# Altium PCB Main_Board.PcbDoc (part 3 of 14)
Units mm, origin at the board's own origin, x right, y up, seen from the top; angles counter-clockwise.
Board outline 142 x 82 mm, 10 copper layers (L1_Top, L2_PWR1, L3_Sig1, L4_GND1, L5_Sig2, L6_Sig3, L7_GND2, L8_Sig4, L9_GND3, L8_Bottom), stack 1.71 mm thick; 299 components, 328 nets, 2329 pads, 2908 vias.
Unrouted connection lines stored in the file: 2.
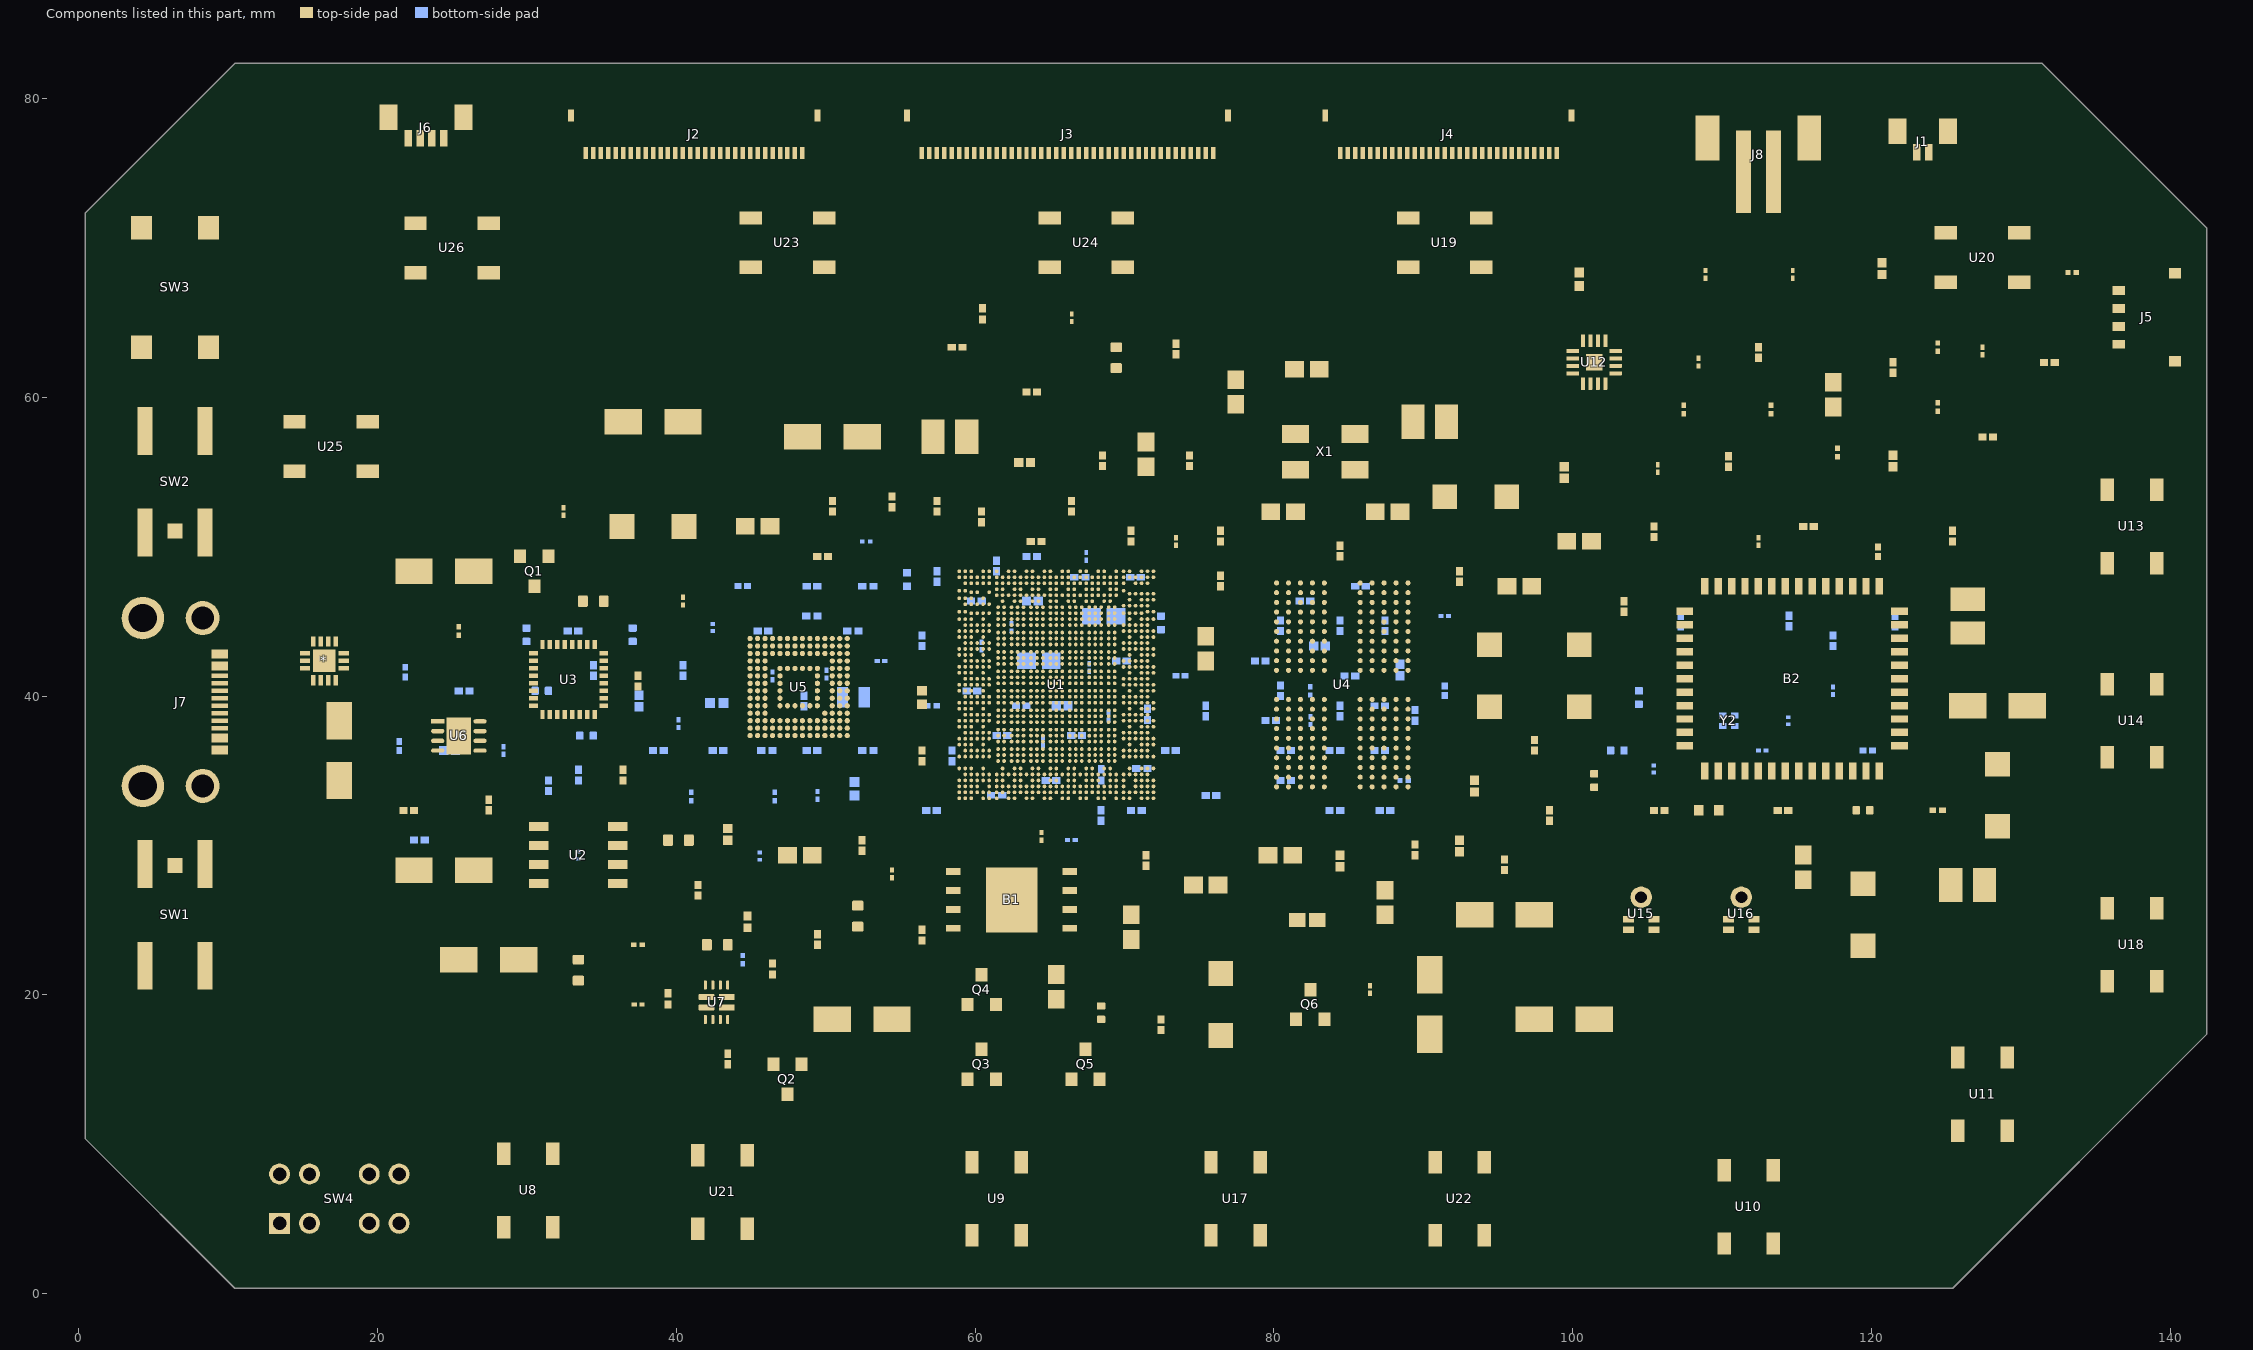
[diagram p11: the components of this part, seen from the top]

## Design rules (kind name [scope] priority, off if disabled: settings) (continued)
Clearance Clearance_1 [InNetClass('PULL_DOWN_UP_RESISTENCE') And (ExistsOnLayer('L3_Sig1') Or ExistsOnLayer('L5_Sig2') Or ExistsOnLayer('L6_Sig3') Or ExistsOnLayer('L8_Sig4')) vs InNetClass('MCU_SIGNAL') And (ExistsOnLayer('L3_Sig1') Or ExistsOnLayer('L5_Sig2') Or ExistsOnLayer('L6_Sig3') Or ExistsOnLayer('L8_Sig4'))] p254: gap=0.02 ignorepadtopadclearanceinfootprint=FALSE except(0.254: Hole-Hole) sourcerule=512 cellrowname=PULL_DOWN_UP_RESISTENCE cellrowtype=2 cellcolname=MCU_SIGNAL cellcoltype=2 innerlayers=TRUE
Clearance Clearance_2 [InNetClass('PULL_DOWN_UP_RESISTENCE') And (ExistsOnLayer('L1_Top') Or ExistsOnLayer('L8_Bottom')) vs InNetClass('MCU_SIGNAL') And (ExistsOnLayer('L1_Top') Or ExistsOnLayer('L8_Bottom'))] p255: gap=0.02 ignorepadtopadclearanceinfootprint=FALSE except(0.254: Hole-Hole) sourcerule=512 cellrowname=PULL_DOWN_UP_RESISTENCE cellrowtype=2 cellcolname=MCU_SIGNAL cellcoltype=2 outerlayers=TRUE
Clearance Clearance_3 [InNetClass('PULL_DOWN_UP_RESISTENCE') vs InNetClass('MCU_SIGNAL')] p256: gap=0.254 ignorepadtopadclearanceinfootprint=FALSE sourcerule=512 cellrowname=PULL_DOWN_UP_RESISTENCE cellrowtype=2 cellcolname=MCU_SIGNAL cellcoltype=2
Clearance Clearance_1 [InNetClass('PULL_DOWN_UP_RESISTENCE') And (ExistsOnLayer('L3_Sig1') Or ExistsOnLayer('L5_Sig2') Or ExistsOnLayer('L6_Sig3') Or ExistsOnLayer('L8_Sig4')) vs InNetClass('MIPI_HIGH_SPEED') And (ExistsOnLayer('L3_Sig1') Or ExistsOnLayer('L5_Sig2') Or ExistsOnLayer('L6_Sig3') Or ExistsOnLayer('L8_Sig4'))] p257: gap=0.02 ignorepadtopadclearanceinfootprint=FALSE except(0.254: Hole-Hole) sourcerule=512 cellrowname=PULL_DOWN_UP_RESISTENCE cellrowtype=2 cellcolname=MIPI_HIGH_SPEED cellcoltype=2 innerlayers=TRUE
Clearance Clearance_2 [InNetClass('PULL_DOWN_UP_RESISTENCE') And (ExistsOnLayer('L1_Top') Or ExistsOnLayer('L8_Bottom')) vs InNetClass('MIPI_HIGH_SPEED') And (ExistsOnLayer('L1_Top') Or ExistsOnLayer('L8_Bottom'))] p258: gap=0.02 ignorepadtopadclearanceinfootprint=FALSE except(0.254: Hole-Hole) sourcerule=512 cellrowname=PULL_DOWN_UP_RESISTENCE cellrowtype=2 cellcolname=MIPI_HIGH_SPEED cellcoltype=2 outerlayers=TRUE
Clearance Clearance_3 [InNetClass('PULL_DOWN_UP_RESISTENCE') vs InNetClass('MIPI_HIGH_SPEED')] p259: gap=0.254 ignorepadtopadclearanceinfootprint=FALSE sourcerule=512 cellrowname=PULL_DOWN_UP_RESISTENCE cellrowtype=2 cellcolname=MIPI_HIGH_SPEED cellcoltype=2
Clearance Clearance_1 [InNetClass('PULL_DOWN_UP_RESISTENCE') And (ExistsOnLayer('L3_Sig1') Or ExistsOnLayer('L5_Sig2') Or ExistsOnLayer('L6_Sig3') Or ExistsOnLayer('L8_Sig4')) vs InNetClass('PERIPHERICS_SIGNALS') And (ExistsOnLayer('L3_Sig1') Or ExistsOnLayer('L5_Sig2') Or ExistsOnLayer('L6_Sig3') Or ExistsOnLayer('L8_Sig4'))] p260: gap=0.02 ignorepadtopadclearanceinfootprint=FALSE except(0.254: Hole-Hole) sourcerule=512 cellrowname=PULL_DOWN_UP_RESISTENCE cellrowtype=2 cellcolname=PERIPHERICS_SIGNALS cellcoltype=2 innerlayers=TRUE
Clearance Clearance_2 [InNetClass('PULL_DOWN_UP_RESISTENCE') And (ExistsOnLayer('L1_Top') Or ExistsOnLayer('L8_Bottom')) vs InNetClass('PERIPHERICS_SIGNALS') And (ExistsOnLayer('L1_Top') Or ExistsOnLayer('L8_Bottom'))] p261: gap=0.02 ignorepadtopadclearanceinfootprint=FALSE except(0.254: Hole-Hole) sourcerule=512 cellrowname=PULL_DOWN_UP_RESISTENCE cellrowtype=2 cellcolname=PERIPHERICS_SIGNALS cellcoltype=2 outerlayers=TRUE
Clearance Clearance_3 [InNetClass('PULL_DOWN_UP_RESISTENCE') vs InNetClass('PERIPHERICS_SIGNALS')] p262: gap=0.254 ignorepadtopadclearanceinfootprint=FALSE sourcerule=512 cellrowname=PULL_DOWN_UP_RESISTENCE cellrowtype=2 cellcolname=PERIPHERICS_SIGNALS cellcoltype=2
Clearance Clearance_1 [InNetClass('PULL_DOWN_UP_RESISTENCE') And (ExistsOnLayer('L3_Sig1') Or ExistsOnLayer('L5_Sig2') Or ExistsOnLayer('L6_Sig3') Or ExistsOnLayer('L8_Sig4')) vs InNetClass('POWER_SIGNALS') And (ExistsOnLayer('L3_Sig1') Or ExistsOnLayer('L5_Sig2') Or ExistsOnLayer('L6_Sig3') Or ExistsOnLayer('L8_Sig4'))] p263: gap=0.02 ignorepadtopadclearanceinfootprint=FALSE except(0.254: Hole-Hole) sourcerule=512 cellrowname=PULL_DOWN_UP_RESISTENCE cellrowtype=2 cellcolname=POWER_SIGNALS cellcoltype=2 innerlayers=TRUE
Clearance Clearance_2 [InNetClass('PULL_DOWN_UP_RESISTENCE') And (ExistsOnLayer('L1_Top') Or ExistsOnLayer('L8_Bottom')) vs InNetClass('POWER_SIGNALS') And (ExistsOnLayer('L1_Top') Or ExistsOnLayer('L8_Bottom'))] p264: gap=0.02 ignorepadtopadclearanceinfootprint=FALSE except(0.254: Hole-Hole) sourcerule=512 cellrowname=PULL_DOWN_UP_RESISTENCE cellrowtype=2 cellcolname=POWER_SIGNALS cellcoltype=2 outerlayers=TRUE
Clearance Clearance_3 [InNetClass('PULL_DOWN_UP_RESISTENCE') vs InNetClass('POWER_SIGNALS')] p265: gap=0.254 ignorepadtopadclearanceinfootprint=FALSE sourcerule=512 cellrowname=PULL_DOWN_UP_RESISTENCE cellrowtype=2 cellcolname=POWER_SIGNALS cellcoltype=2
Clearance Clearance_1 [InNetClass('PULL_DOWN_UP_RESISTENCE') And (ExistsOnLayer('L3_Sig1') Or ExistsOnLayer('L5_Sig2') Or ExistsOnLayer('L6_Sig3') Or ExistsOnLayer('L8_Sig4')) vs InNetClass('POWER_SUPPLY') And (ExistsOnLayer('L3_Sig1') Or ExistsOnLayer('L5_Sig2') Or ExistsOnLayer('L6_Sig3') Or ExistsOnLayer('L8_Sig4'))] p266: gap=0.02 ignorepadtopadclearanceinfootprint=FALSE except(0.254: Hole-Hole) sourcerule=512 cellrowname=PULL_DOWN_UP_RESISTENCE cellrowtype=2 cellcolname=POWER_SUPPLY cellcoltype=2 innerlayers=TRUE
Clearance Clearance_2 [InNetClass('PULL_DOWN_UP_RESISTENCE') And (ExistsOnLayer('L1_Top') Or ExistsOnLayer('L8_Bottom')) vs InNetClass('POWER_SUPPLY') And (ExistsOnLayer('L1_Top') Or ExistsOnLayer('L8_Bottom'))] p267: gap=0.02 ignorepadtopadclearanceinfootprint=FALSE except(0.254: Hole-Hole) sourcerule=512 cellrowname=PULL_DOWN_UP_RESISTENCE cellrowtype=2 cellcolname=POWER_SUPPLY cellcoltype=2 outerlayers=TRUE
Clearance Clearance_3 [InNetClass('PULL_DOWN_UP_RESISTENCE') vs InNetClass('POWER_SUPPLY')] p268: gap=0.254 ignorepadtopadclearanceinfootprint=FALSE sourcerule=512 cellrowname=PULL_DOWN_UP_RESISTENCE cellrowtype=2 cellcolname=POWER_SUPPLY cellcoltype=2
Clearance Clearance_1 [InNetClass('PULL_DOWN_UP_RESISTENCE') And (ExistsOnLayer('L3_Sig1') Or ExistsOnLayer('L5_Sig2') Or ExistsOnLayer('L6_Sig3') Or ExistsOnLayer('L8_Sig4')) vs InNetClass('PULL_DOWN_UP_RESISTENCE') And (ExistsOnLayer('L3_Sig1') Or ExistsOnLayer('L5_Sig2') Or ExistsOnLayer('L6_Sig3') Or ExistsOnLayer('L8_Sig4'))] p269: gap=0.02 ignorepadtopadclearanceinfootprint=FALSE except(0.254: Hole-Hole) sourcerule=512 cellrowname=PULL_DOWN_UP_RESISTENCE cellrowtype=2 cellcolname=PULL_DOWN_UP_RESISTENCE cellcoltype=2 innerlayers=TRUE
Clearance Clearance_2 [InNetClass('PULL_DOWN_UP_RESISTENCE') And (ExistsOnLayer('L1_Top') Or ExistsOnLayer('L8_Bottom')) vs InNetClass('PULL_DOWN_UP_RESISTENCE') And (ExistsOnLayer('L1_Top') Or ExistsOnLayer('L8_Bottom'))] p270: gap=0.02 ignorepadtopadclearanceinfootprint=FALSE except(0.254: Hole-Hole) sourcerule=512 cellrowname=PULL_DOWN_UP_RESISTENCE cellrowtype=2 cellcolname=PULL_DOWN_UP_RESISTENCE cellcoltype=2 outerlayers=TRUE
Clearance Clearance_3 [InNetClass('PULL_DOWN_UP_RESISTENCE') vs InNetClass('PULL_DOWN_UP_RESISTENCE')] p271: gap=0.254 ignorepadtopadclearanceinfootprint=FALSE sourcerule=512 cellrowname=PULL_DOWN_UP_RESISTENCE cellrowtype=2 cellcolname=PULL_DOWN_UP_RESISTENCE cellcoltype=2
Clearance Clearance_1 [InNetClass('TYPEC_SIGNALS') And (ExistsOnLayer('L3_Sig1') Or ExistsOnLayer('L5_Sig2') Or ExistsOnLayer('L6_Sig3') Or ExistsOnLayer('L8_Sig4')) vs InNetClass('ANTENAS') And (ExistsOnLayer('L3_Sig1') Or ExistsOnLayer('L5_Sig2') Or ExistsOnLayer('L6_Sig3') Or ExistsOnLayer('L8_Sig4'))] p272: gap=0.02 ignorepadtopadclearanceinfootprint=FALSE except(0.05: Hole-Hole) sourcerule=512 cellrowname=TYPEC_SIGNALS cellrowtype=2 cellcolname=ANTENAS cellcoltype=2 innerlayers=TRUE
Clearance Clearance_2 [InNetClass('TYPEC_SIGNALS') And (ExistsOnLayer('L1_Top') Or ExistsOnLayer('L8_Bottom')) vs InNetClass('ANTENAS') And (ExistsOnLayer('L1_Top') Or ExistsOnLayer('L8_Bottom'))] p273: gap=0.02 ignorepadtopadclearanceinfootprint=FALSE except(0.05: Hole-Hole) sourcerule=512 cellrowname=TYPEC_SIGNALS cellrowtype=2 cellcolname=ANTENAS cellcoltype=2 outerlayers=TRUE
Clearance Clearance_3 [InNetClass('TYPEC_SIGNALS') vs InNetClass('ANTENAS')] p274: gap=0.254 ignorepadtopadclearanceinfootprint=FALSE sourcerule=512 cellrowname=TYPEC_SIGNALS cellrowtype=2 cellcolname=ANTENAS cellcoltype=2
Clearance Clearance_1 [InNetClass('TYPEC_SIGNALS') And (ExistsOnLayer('L3_Sig1') Or ExistsOnLayer('L5_Sig2') Or ExistsOnLayer('L6_Sig3') Or ExistsOnLayer('L8_Sig4')) vs (ExistsOnLayer('L3_Sig1') Or ExistsOnLayer('L5_Sig2') Or ExistsOnLayer('L6_Sig3') Or ExistsOnLayer('L8_Sig4'))] p275: gap=0.02 ignorepadtopadclearanceinfootprint=FALSE except(0.254: Hole-Hole) sourcerule=512 cellrowname=TYPEC_SIGNALS cellrowtype=2 cellcolname=All cellcoltype=0 innerlayers=TRUE
Clearance Clearance_2 [InNetClass('TYPEC_SIGNALS') And (ExistsOnLayer('L1_Top') Or ExistsOnLayer('L8_Bottom')) vs (ExistsOnLayer('L1_Top') Or ExistsOnLayer('L8_Bottom'))] p276: gap=0.02 ignorepadtopadclearanceinfootprint=FALSE except(0.254: Hole-Hole) sourcerule=512 cellrowname=TYPEC_SIGNALS cellrowtype=2 cellcolname=All cellcoltype=0 outerlayers=TRUE
Clearance Clearance_3 [InNetClass('TYPEC_SIGNALS')] p277: gap=0.254 ignorepadtopadclearanceinfootprint=FALSE sourcerule=512 cellrowname=TYPEC_SIGNALS cellrowtype=2 cellcolname=All cellcoltype=0
Clearance Clearance_1 [InNetClass('TYPEC_SIGNALS') And (ExistsOnLayer('L3_Sig1') Or ExistsOnLayer('L5_Sig2') Or ExistsOnLayer('L6_Sig3') Or ExistsOnLayer('L8_Sig4')) vs InNetClass('CPU_SIGNAL') And (ExistsOnLayer('L3_Sig1') Or ExistsOnLayer('L5_Sig2') Or ExistsOnLayer('L6_Sig3') Or ExistsOnLayer('L8_Sig4'))] p278: gap=0.02 ignorepadtopadclearanceinfootprint=FALSE except(0.254: Hole-Hole) sourcerule=512 cellrowname=TYPEC_SIGNALS cellrowtype=2 cellcolname=CPU_SIGNAL cellcoltype=2 innerlayers=TRUE
Clearance Clearance_2 [InNetClass('TYPEC_SIGNALS') And (ExistsOnLayer('L1_Top') Or ExistsOnLayer('L8_Bottom')) vs InNetClass('CPU_SIGNAL') And (ExistsOnLayer('L1_Top') Or ExistsOnLayer('L8_Bottom'))] p279: gap=0.02 ignorepadtopadclearanceinfootprint=FALSE except(0.254: Hole-Hole) sourcerule=512 cellrowname=TYPEC_SIGNALS cellrowtype=2 cellcolname=CPU_SIGNAL cellcoltype=2 outerlayers=TRUE
Clearance Clearance_3 [InNetClass('TYPEC_SIGNALS') vs InNetClass('CPU_SIGNAL')] p280: gap=0.254 ignorepadtopadclearanceinfootprint=FALSE sourcerule=512 cellrowname=TYPEC_SIGNALS cellrowtype=2 cellcolname=CPU_SIGNAL cellcoltype=2
Clearance Clearance_1 [InNetClass('TYPEC_SIGNALS') And (ExistsOnLayer('L3_Sig1') Or ExistsOnLayer('L5_Sig2') Or ExistsOnLayer('L6_Sig3') Or ExistsOnLayer('L8_Sig4')) vs InNetClass('CSI_HIGH_SPEED') And (ExistsOnLayer('L3_Sig1') Or ExistsOnLayer('L5_Sig2') Or ExistsOnLayer('L6_Sig3') Or ExistsOnLayer('L8_Sig4'))] p281: gap=0.02 ignorepadtopadclearanceinfootprint=FALSE except(0.254: Hole-Hole) sourcerule=512 cellrowname=TYPEC_SIGNALS cellrowtype=2 cellcolname=CSI_HIGH_SPEED cellcoltype=2 innerlayers=TRUE
Clearance Clearance_2 [InNetClass('TYPEC_SIGNALS') And (ExistsOnLayer('L1_Top') Or ExistsOnLayer('L8_Bottom')) vs InNetClass('CSI_HIGH_SPEED') And (ExistsOnLayer('L1_Top') Or ExistsOnLayer('L8_Bottom'))] p282: gap=0.02 ignorepadtopadclearanceinfootprint=FALSE except(0.254: Hole-Hole) sourcerule=512 cellrowname=TYPEC_SIGNALS cellrowtype=2 cellcolname=CSI_HIGH_SPEED cellcoltype=2 outerlayers=TRUE
Clearance Clearance_3 [InNetClass('TYPEC_SIGNALS') vs InNetClass('CSI_HIGH_SPEED')] p283: gap=0.254 ignorepadtopadclearanceinfootprint=FALSE sourcerule=512 cellrowname=TYPEC_SIGNALS cellrowtype=2 cellcolname=CSI_HIGH_SPEED cellcoltype=2
Clearance Clearance_1 [InNetClass('TYPEC_SIGNALS') And (ExistsOnLayer('L3_Sig1') Or ExistsOnLayer('L5_Sig2') Or ExistsOnLayer('L6_Sig3') Or ExistsOnLayer('L8_Sig4')) vs InNetClass('DDR1_HIGH_SPEED') And (ExistsOnLayer('L3_Sig1') Or ExistsOnLayer('L5_Sig2') Or ExistsOnLayer('L6_Sig3') Or ExistsOnLayer('L8_Sig4'))] p284: gap=0.02 ignorepadtopadclearanceinfootprint=FALSE except(0.089: Hole-Hole) sourcerule=512 cellrowname=TYPEC_SIGNALS cellrowtype=2 cellcolname=DDR1_HIGH_SPEED cellcoltype=2 innerlayers=TRUE
Clearance Clearance_2 [InNetClass('TYPEC_SIGNALS') And (ExistsOnLayer('L1_Top') Or ExistsOnLayer('L8_Bottom')) vs InNetClass('DDR1_HIGH_SPEED') And (ExistsOnLayer('L1_Top') Or ExistsOnLayer('L8_Bottom'))] p285: gap=0.02 ignorepadtopadclearanceinfootprint=FALSE except(0.089: Hole-Hole) sourcerule=512 cellrowname=TYPEC_SIGNALS cellrowtype=2 cellcolname=DDR1_HIGH_SPEED cellcoltype=2 outerlayers=TRUE
Clearance Clearance_3 [InNetClass('TYPEC_SIGNALS') vs InNetClass('DDR1_HIGH_SPEED')] p286: gap=0.254 ignorepadtopadclearanceinfootprint=FALSE sourcerule=512 cellrowname=TYPEC_SIGNALS cellrowtype=2 cellcolname=DDR1_HIGH_SPEED cellcoltype=2
Clearance Clearance_1 [InNetClass('TYPEC_SIGNALS') And (ExistsOnLayer('L3_Sig1') Or ExistsOnLayer('L5_Sig2') Or ExistsOnLayer('L6_Sig3') Or ExistsOnLayer('L8_Sig4')) vs InNetClass('EMMC_HIGH_SPEED') And (ExistsOnLayer('L3_Sig1') Or ExistsOnLayer('L5_Sig2') Or ExistsOnLayer('L6_Sig3') Or ExistsOnLayer('L8_Sig4'))] p287: gap=0.02 ignorepadtopadclearanceinfootprint=FALSE except(0.254: Hole-Hole) sourcerule=512 cellrowname=TYPEC_SIGNALS cellrowtype=2 cellcolname=EMMC_HIGH_SPEED cellcoltype=2 innerlayers=TRUE
Clearance Clearance_2 [InNetClass('TYPEC_SIGNALS') And (ExistsOnLayer('L1_Top') Or ExistsOnLayer('L8_Bottom')) vs InNetClass('EMMC_HIGH_SPEED') And (ExistsOnLayer('L1_Top') Or ExistsOnLayer('L8_Bottom'))] p288: gap=0.02 ignorepadtopadclearanceinfootprint=FALSE except(0.254: Hole-Hole) sourcerule=512 cellrowname=TYPEC_SIGNALS cellrowtype=2 cellcolname=EMMC_HIGH_SPEED cellcoltype=2 outerlayers=TRUE
Clearance Clearance_3 [InNetClass('TYPEC_SIGNALS') vs InNetClass('EMMC_HIGH_SPEED')] p289: gap=0.254 ignorepadtopadclearanceinfootprint=FALSE sourcerule=512 cellrowname=TYPEC_SIGNALS cellrowtype=2 cellcolname=EMMC_HIGH_SPEED cellcoltype=2
Clearance Clearance_1 [InNetClass('TYPEC_SIGNALS') And (ExistsOnLayer('L3_Sig1') Or ExistsOnLayer('L5_Sig2') Or ExistsOnLayer('L6_Sig3') Or ExistsOnLayer('L8_Sig4')) vs InNetClass('I2S_PROTOCOL') And (ExistsOnLayer('L3_Sig1') Or ExistsOnLayer('L5_Sig2') Or ExistsOnLayer('L6_Sig3') Or ExistsOnLayer('L8_Sig4'))] p290: gap=0.02 ignorepadtopadclearanceinfootprint=FALSE except(0.254: Hole-Hole) sourcerule=512 cellrowname=TYPEC_SIGNALS cellrowtype=2 cellcolname=I2S_PROTOCOL cellcoltype=2 innerlayers=TRUE
Clearance Clearance_2 [InNetClass('TYPEC_SIGNALS') And (ExistsOnLayer('L1_Top') Or ExistsOnLayer('L8_Bottom')) vs InNetClass('I2S_PROTOCOL') And (ExistsOnLayer('L1_Top') Or ExistsOnLayer('L8_Bottom'))] p291: gap=0.02 ignorepadtopadclearanceinfootprint=FALSE except(0.254: Hole-Hole) sourcerule=512 cellrowname=TYPEC_SIGNALS cellrowtype=2 cellcolname=I2S_PROTOCOL cellcoltype=2 outerlayers=TRUE
Clearance Clearance_3 [InNetClass('TYPEC_SIGNALS') vs InNetClass('I2S_PROTOCOL')] p292: gap=0.254 ignorepadtopadclearanceinfootprint=FALSE sourcerule=512 cellrowname=TYPEC_SIGNALS cellrowtype=2 cellcolname=I2S_PROTOCOL cellcoltype=2
Clearance Clearance_1 [InNetClass('TYPEC_SIGNALS') And (ExistsOnLayer('L3_Sig1') Or ExistsOnLayer('L5_Sig2') Or ExistsOnLayer('L6_Sig3') Or ExistsOnLayer('L8_Sig4')) vs InNetClass('MCU_SIGNAL') And (ExistsOnLayer('L3_Sig1') Or ExistsOnLayer('L5_Sig2') Or ExistsOnLayer('L6_Sig3') Or ExistsOnLayer('L8_Sig4'))] p293: gap=0.02 ignorepadtopadclearanceinfootprint=FALSE except(0.254: Hole-Hole) sourcerule=512 cellrowname=TYPEC_SIGNALS cellrowtype=2 cellcolname=MCU_SIGNAL cellcoltype=2 innerlayers=TRUE
Clearance Clearance_2 [InNetClass('TYPEC_SIGNALS') And (ExistsOnLayer('L1_Top') Or ExistsOnLayer('L8_Bottom')) vs InNetClass('MCU_SIGNAL') And (ExistsOnLayer('L1_Top') Or ExistsOnLayer('L8_Bottom'))] p294: gap=0.02 ignorepadtopadclearanceinfootprint=FALSE except(0.254: Hole-Hole) sourcerule=512 cellrowname=TYPEC_SIGNALS cellrowtype=2 cellcolname=MCU_SIGNAL cellcoltype=2 outerlayers=TRUE
Clearance Clearance_3 [InNetClass('TYPEC_SIGNALS') vs InNetClass('MCU_SIGNAL')] p295: gap=0.254 ignorepadtopadclearanceinfootprint=FALSE sourcerule=512 cellrowname=TYPEC_SIGNALS cellrowtype=2 cellcolname=MCU_SIGNAL cellcoltype=2
Clearance Clearance_1 [InNetClass('TYPEC_SIGNALS') And (ExistsOnLayer('L3_Sig1') Or ExistsOnLayer('L5_Sig2') Or ExistsOnLayer('L6_Sig3') Or ExistsOnLayer('L8_Sig4')) vs InNetClass('MIPI_HIGH_SPEED') And (ExistsOnLayer('L3_Sig1') Or ExistsOnLayer('L5_Sig2') Or ExistsOnLayer('L6_Sig3') Or ExistsOnLayer('L8_Sig4'))] p296: gap=0.02 ignorepadtopadclearanceinfootprint=FALSE except(0.254: Hole-Hole) sourcerule=512 cellrowname=TYPEC_SIGNALS cellrowtype=2 cellcolname=MIPI_HIGH_SPEED cellcoltype=2 innerlayers=TRUE
Clearance Clearance_2 [InNetClass('TYPEC_SIGNALS') And (ExistsOnLayer('L1_Top') Or ExistsOnLayer('L8_Bottom')) vs InNetClass('MIPI_HIGH_SPEED') And (ExistsOnLayer('L1_Top') Or ExistsOnLayer('L8_Bottom'))] p297: gap=0.02 ignorepadtopadclearanceinfootprint=FALSE except(0.254: Hole-Hole) sourcerule=512 cellrowname=TYPEC_SIGNALS cellrowtype=2 cellcolname=MIPI_HIGH_SPEED cellcoltype=2 outerlayers=TRUE
Clearance Clearance_3 [InNetClass('TYPEC_SIGNALS') vs InNetClass('MIPI_HIGH_SPEED')] p298: gap=0.254 ignorepadtopadclearanceinfootprint=FALSE sourcerule=512 cellrowname=TYPEC_SIGNALS cellrowtype=2 cellcolname=MIPI_HIGH_SPEED cellcoltype=2
Clearance Clearance_1 [InNetClass('TYPEC_SIGNALS') And (ExistsOnLayer('L3_Sig1') Or ExistsOnLayer('L5_Sig2') Or ExistsOnLayer('L6_Sig3') Or ExistsOnLayer('L8_Sig4')) vs InNetClass('PERIPHERICS_SIGNALS') And (ExistsOnLayer('L3_Sig1') Or ExistsOnLayer('L5_Sig2') Or ExistsOnLayer('L6_Sig3') Or ExistsOnLayer('L8_Sig4'))] p299: gap=0.02 ignorepadtopadclearanceinfootprint=FALSE except(0.254: Hole-Hole) sourcerule=512 cellrowname=TYPEC_SIGNALS cellrowtype=2 cellcolname=PERIPHERICS_SIGNALS cellcoltype=2 innerlayers=TRUE
Clearance Clearance_2 [InNetClass('TYPEC_SIGNALS') And (ExistsOnLayer('L1_Top') Or ExistsOnLayer('L8_Bottom')) vs InNetClass('PERIPHERICS_SIGNALS') And (ExistsOnLayer('L1_Top') Or ExistsOnLayer('L8_Bottom'))] p300: gap=0.02 ignorepadtopadclearanceinfootprint=FALSE except(0.254: Hole-Hole) sourcerule=512 cellrowname=TYPEC_SIGNALS cellrowtype=2 cellcolname=PERIPHERICS_SIGNALS cellcoltype=2 outerlayers=TRUE
Clearance Clearance_3 [InNetClass('TYPEC_SIGNALS') vs InNetClass('PERIPHERICS_SIGNALS')] p301: gap=0.254 ignorepadtopadclearanceinfootprint=FALSE sourcerule=512 cellrowname=TYPEC_SIGNALS cellrowtype=2 cellcolname=PERIPHERICS_SIGNALS cellcoltype=2
Clearance Clearance_1 [InNetClass('TYPEC_SIGNALS') And (ExistsOnLayer('L3_Sig1') Or ExistsOnLayer('L5_Sig2') Or ExistsOnLayer('L6_Sig3') Or ExistsOnLayer('L8_Sig4')) vs InNetClass('POWER_SIGNALS') And (ExistsOnLayer('L3_Sig1') Or ExistsOnLayer('L5_Sig2') Or ExistsOnLayer('L6_Sig3') Or ExistsOnLayer('L8_Sig4'))] p302: gap=0.02 ignorepadtopadclearanceinfootprint=FALSE except(0.254: Hole-Hole) sourcerule=512 cellrowname=TYPEC_SIGNALS cellrowtype=2 cellcolname=POWER_SIGNALS cellcoltype=2 innerlayers=TRUE
Clearance Clearance_2 [InNetClass('TYPEC_SIGNALS') And (ExistsOnLayer('L1_Top') Or ExistsOnLayer('L8_Bottom')) vs InNetClass('POWER_SIGNALS') And (ExistsOnLayer('L1_Top') Or ExistsOnLayer('L8_Bottom'))] p303: gap=0.02 ignorepadtopadclearanceinfootprint=FALSE except(0.254: Hole-Hole) sourcerule=512 cellrowname=TYPEC_SIGNALS cellrowtype=2 cellcolname=POWER_SIGNALS cellcoltype=2 outerlayers=TRUE
Clearance Clearance_3 [InNetClass('TYPEC_SIGNALS') vs InNetClass('POWER_SIGNALS')] p304: gap=0.254 ignorepadtopadclearanceinfootprint=FALSE sourcerule=512 cellrowname=TYPEC_SIGNALS cellrowtype=2 cellcolname=POWER_SIGNALS cellcoltype=2
Clearance Clearance_1 [InNetClass('TYPEC_SIGNALS') And (ExistsOnLayer('L3_Sig1') Or ExistsOnLayer('L5_Sig2') Or ExistsOnLayer('L6_Sig3') Or ExistsOnLayer('L8_Sig4')) vs InNetClass('POWER_SUPPLY') And (ExistsOnLayer('L3_Sig1') Or ExistsOnLayer('L5_Sig2') Or ExistsOnLayer('L6_Sig3') Or ExistsOnLayer('L8_Sig4'))] p305: gap=0.02 ignorepadtopadclearanceinfootprint=FALSE except(0.254: Hole-Hole) sourcerule=512 cellrowname=TYPEC_SIGNALS cellrowtype=2 cellcolname=POWER_SUPPLY cellcoltype=2 innerlayers=TRUE
Clearance Clearance_2 [InNetClass('TYPEC_SIGNALS') And (ExistsOnLayer('L1_Top') Or ExistsOnLayer('L8_Bottom')) vs InNetClass('POWER_SUPPLY') And (ExistsOnLayer('L1_Top') Or ExistsOnLayer('L8_Bottom'))] p306: gap=0.02 ignorepadtopadclearanceinfootprint=FALSE except(0.254: Hole-Hole) sourcerule=512 cellrowname=TYPEC_SIGNALS cellrowtype=2 cellcolname=POWER_SUPPLY cellcoltype=2 outerlayers=TRUE
Clearance Clearance_3 [InNetClass('TYPEC_SIGNALS') vs InNetClass('POWER_SUPPLY')] p307: gap=0.254 ignorepadtopadclearanceinfootprint=FALSE sourcerule=512 cellrowname=TYPEC_SIGNALS cellrowtype=2 cellcolname=POWER_SUPPLY cellcoltype=2
Clearance Clearance_1 [InNetClass('TYPEC_SIGNALS') And (ExistsOnLayer('L3_Sig1') Or ExistsOnLayer('L5_Sig2') Or ExistsOnLayer('L6_Sig3') Or ExistsOnLayer('L8_Sig4')) vs InNetClass('PULL_DOWN_UP_RESISTENCE') And (ExistsOnLayer('L3_Sig1') Or ExistsOnLayer('L5_Sig2') Or ExistsOnLayer('L6_Sig3') Or ExistsOnLayer('L8_Sig4'))] p308: gap=0.02 ignorepadtopadclearanceinfootprint=FALSE except(0.254: Hole-Hole) sourcerule=512 cellrowname=TYPEC_SIGNALS cellrowtype=2 cellcolname=PULL_DOWN_UP_RESISTENCE cellcoltype=2 innerlayers=TRUE
Clearance Clearance_2 [InNetClass('TYPEC_SIGNALS') And (ExistsOnLayer('L1_Top') Or ExistsOnLayer('L8_Bottom')) vs InNetClass('PULL_DOWN_UP_RESISTENCE') And (ExistsOnLayer('L1_Top') Or ExistsOnLayer('L8_Bottom'))] p309: gap=0.02 ignorepadtopadclearanceinfootprint=FALSE except(0.254: Hole-Hole) sourcerule=512 cellrowname=TYPEC_SIGNALS cellrowtype=2 cellcolname=PULL_DOWN_UP_RESISTENCE cellcoltype=2 outerlayers=TRUE
Clearance Clearance_3 [InNetClass('TYPEC_SIGNALS') vs InNetClass('PULL_DOWN_UP_RESISTENCE')] p310: gap=0.254 ignorepadtopadclearanceinfootprint=FALSE sourcerule=512 cellrowname=TYPEC_SIGNALS cellrowtype=2 cellcolname=PULL_DOWN_UP_RESISTENCE cellcoltype=2
Clearance Clearance_1 [InNetClass('TYPEC_SIGNALS') And (ExistsOnLayer('L3_Sig1') Or ExistsOnLayer('L5_Sig2') Or ExistsOnLayer('L6_Sig3') Or ExistsOnLayer('L8_Sig4')) vs InNetClass('TYPEC_SIGNALS') And (ExistsOnLayer('L3_Sig1') Or ExistsOnLayer('L5_Sig2') Or ExistsOnLayer('L6_Sig3') Or ExistsOnLayer('L8_Sig4'))] p311: gap=0.02 ignorepadtopadclearanceinfootprint=FALSE except(0.254: Hole-Hole) sourcerule=512 cellrowname=TYPEC_SIGNALS cellrowtype=2 cellcolname=TYPEC_SIGNALS cellcoltype=2 innerlayers=TRUE
Clearance Clearance_2 [InNetClass('TYPEC_SIGNALS') And (ExistsOnLayer('L1_Top') Or ExistsOnLayer('L8_Bottom')) vs InNetClass('TYPEC_SIGNALS') And (ExistsOnLayer('L1_Top') Or ExistsOnLayer('L8_Bottom'))] p312: gap=0.02 ignorepadtopadclearanceinfootprint=FALSE except(0.254: Hole-Hole) sourcerule=512 cellrowname=TYPEC_SIGNALS cellrowtype=2 cellcolname=TYPEC_SIGNALS cellcoltype=2 outerlayers=TRUE
Clearance Clearance_3 [InNetClass('TYPEC_SIGNALS') vs InNetClass('TYPEC_SIGNALS')] p313: gap=0.254 ignorepadtopadclearanceinfootprint=FALSE sourcerule=512 cellrowname=TYPEC_SIGNALS cellrowtype=2 cellcolname=TYPEC_SIGNALS cellcoltype=2
Clearance Clearance_1 [InNetClass('UNCLASIFICATE_LOW_SPEED_SIGNALS') And (ExistsOnLayer('L3_Sig1') Or ExistsOnLayer('L5_Sig2') Or ExistsOnLayer('L6_Sig3') Or ExistsOnLayer('L8_Sig4')) vs InNetClass('ANTENAS') And (ExistsOnLayer('L3_Sig1') Or ExistsOnLayer('L5_Sig2') Or ExistsOnLayer('L6_Sig3') Or ExistsOnLayer('L8_Sig4'))] p314: gap=0.02 ignorepadtopadclearanceinfootprint=FALSE except(0.05: Hole-Hole) sourcerule=512 cellrowname=UNCLASIFICATE_LOW_SPEED_SIGNALS cellrowtype=2 cellcolname=ANTENAS cellcoltype=2 innerlayers=TRUE
Clearance Clearance_2 [InNetClass('UNCLASIFICATE_LOW_SPEED_SIGNALS') And (ExistsOnLayer('L1_Top') Or ExistsOnLayer('L8_Bottom')) vs InNetClass('ANTENAS') And (ExistsOnLayer('L1_Top') Or ExistsOnLayer('L8_Bottom'))] p315: gap=0.02 ignorepadtopadclearanceinfootprint=FALSE except(0.05: Hole-Hole) sourcerule=512 cellrowname=UNCLASIFICATE_LOW_SPEED_SIGNALS cellrowtype=2 cellcolname=ANTENAS cellcoltype=2 outerlayers=TRUE
Clearance Clearance_3 [InNetClass('UNCLASIFICATE_LOW_SPEED_SIGNALS') vs InNetClass('ANTENAS')] p316: gap=0.254 ignorepadtopadclearanceinfootprint=FALSE sourcerule=512 cellrowname=UNCLASIFICATE_LOW_SPEED_SIGNALS cellrowtype=2 cellcolname=ANTENAS cellcoltype=2
Clearance Clearance_1 [InNetClass('UNCLASIFICATE_LOW_SPEED_SIGNALS') And (ExistsOnLayer('L3_Sig1') Or ExistsOnLayer('L5_Sig2') Or ExistsOnLayer('L6_Sig3') Or ExistsOnLayer('L8_Sig4')) vs (ExistsOnLayer('L3_Sig1') Or ExistsOnLayer('L5_Sig2') Or ExistsOnLayer('L6_Sig3') Or ExistsOnLayer('L8_Sig4'))] p317: gap=0.02 ignorepadtopadclearanceinfootprint=FALSE except(0.254: Hole-Hole) sourcerule=512 cellrowname=UNCLASIFICATE_LOW_SPEED_SIGNALS cellrowtype=2 cellcolname=All cellcoltype=0 innerlayers=TRUE
Clearance Clearance_2 [InNetClass('UNCLASIFICATE_LOW_SPEED_SIGNALS') And (ExistsOnLayer('L1_Top') Or ExistsOnLayer('L8_Bottom')) vs (ExistsOnLayer('L1_Top') Or ExistsOnLayer('L8_Bottom'))] p318: gap=0.02 ignorepadtopadclearanceinfootprint=FALSE except(0.254: Hole-Hole) sourcerule=512 cellrowname=UNCLASIFICATE_LOW_SPEED_SIGNALS cellrowtype=2 cellcolname=All cellcoltype=0 outerlayers=TRUE
Clearance Clearance_3 [InNetClass('UNCLASIFICATE_LOW_SPEED_SIGNALS')] p319: gap=0.254 ignorepadtopadclearanceinfootprint=FALSE sourcerule=512 cellrowname=UNCLASIFICATE_LOW_SPEED_SIGNALS cellrowtype=2 cellcolname=All cellcoltype=0
Clearance Clearance_1 [InNetClass('UNCLASIFICATE_LOW_SPEED_SIGNALS') And (ExistsOnLayer('L3_Sig1') Or ExistsOnLayer('L5_Sig2') Or ExistsOnLayer('L6_Sig3') Or ExistsOnLayer('L8_Sig4')) vs InNetClass('CPU_SIGNAL') And (ExistsOnLayer('L3_Sig1') Or ExistsOnLayer('L5_Sig2') Or ExistsOnLayer('L6_Sig3') Or ExistsOnLayer('L8_Sig4'))] p320: gap=0.02 ignorepadtopadclearanceinfootprint=FALSE except(0.254: Hole-Hole) sourcerule=512 cellrowname=UNCLASIFICATE_LOW_SPEED_SIGNALS cellrowtype=2 cellcolname=CPU_SIGNAL cellcoltype=2 innerlayers=TRUE
Clearance Clearance_2 [InNetClass('UNCLASIFICATE_LOW_SPEED_SIGNALS') And (ExistsOnLayer('L1_Top') Or ExistsOnLayer('L8_Bottom')) vs InNetClass('CPU_SIGNAL') And (ExistsOnLayer('L1_Top') Or ExistsOnLayer('L8_Bottom'))] p321: gap=0.02 ignorepadtopadclearanceinfootprint=FALSE except(0.254: Hole-Hole) sourcerule=512 cellrowname=UNCLASIFICATE_LOW_SPEED_SIGNALS cellrowtype=2 cellcolname=CPU_SIGNAL cellcoltype=2 outerlayers=TRUE
Clearance Clearance_3 [InNetClass('UNCLASIFICATE_LOW_SPEED_SIGNALS') vs InNetClass('CPU_SIGNAL')] p322: gap=0.254 ignorepadtopadclearanceinfootprint=FALSE sourcerule=512 cellrowname=UNCLASIFICATE_LOW_SPEED_SIGNALS cellrowtype=2 cellcolname=CPU_SIGNAL cellcoltype=2
Clearance Clearance_1 [InNetClass('UNCLASIFICATE_LOW_SPEED_SIGNALS') And (ExistsOnLayer('L3_Sig1') Or ExistsOnLayer('L5_Sig2') Or ExistsOnLayer('L6_Sig3') Or ExistsOnLayer('L8_Sig4')) vs InNetClass('CSI_HIGH_SPEED') And (ExistsOnLayer('L3_Sig1') Or ExistsOnLayer('L5_Sig2') Or ExistsOnLayer('L6_Sig3') Or ExistsOnLayer('L8_Sig4'))] p323: gap=0.02 ignorepadtopadclearanceinfootprint=FALSE except(0.254: Hole-Hole) sourcerule=512 cellrowname=UNCLASIFICATE_LOW_SPEED_SIGNALS cellrowtype=2 cellcolname=CSI_HIGH_SPEED cellcoltype=2 innerlayers=TRUE
Clearance Clearance_2 [InNetClass('UNCLASIFICATE_LOW_SPEED_SIGNALS') And (ExistsOnLayer('L1_Top') Or ExistsOnLayer('L8_Bottom')) vs InNetClass('CSI_HIGH_SPEED') And (ExistsOnLayer('L1_Top') Or ExistsOnLayer('L8_Bottom'))] p324: gap=0.02 ignorepadtopadclearanceinfootprint=FALSE except(0.254: Hole-Hole) sourcerule=512 cellrowname=UNCLASIFICATE_LOW_SPEED_SIGNALS cellrowtype=2 cellcolname=CSI_HIGH_SPEED cellcoltype=2 outerlayers=TRUE
Clearance Clearance_3 [InNetClass('UNCLASIFICATE_LOW_SPEED_SIGNALS') vs InNetClass('CSI_HIGH_SPEED')] p325: gap=0.254 ignorepadtopadclearanceinfootprint=FALSE sourcerule=512 cellrowname=UNCLASIFICATE_LOW_SPEED_SIGNALS cellrowtype=2 cellcolname=CSI_HIGH_SPEED cellcoltype=2
Clearance Clearance_1 [InNetClass('UNCLASIFICATE_LOW_SPEED_SIGNALS') And (ExistsOnLayer('L3_Sig1') Or ExistsOnLayer('L5_Sig2') Or ExistsOnLayer('L6_Sig3') Or ExistsOnLayer('L8_Sig4')) vs InNetClass('DDR1_HIGH_SPEED') And (ExistsOnLayer('L3_Sig1') Or ExistsOnLayer('L5_Sig2') Or ExistsOnLayer('L6_Sig3') Or ExistsOnLayer('L8_Sig4'))] p326: gap=0.02 ignorepadtopadclearanceinfootprint=FALSE except(0.089: Hole-Hole) sourcerule=512 cellrowname=UNCLASIFICATE_LOW_SPEED_SIGNALS cellrowtype=2 cellcolname=DDR1_HIGH_SPEED cellcoltype=2 innerlayers=TRUE
Clearance Clearance_2 [InNetClass('UNCLASIFICATE_LOW_SPEED_SIGNALS') And (ExistsOnLayer('L1_Top') Or ExistsOnLayer('L8_Bottom')) vs InNetClass('DDR1_HIGH_SPEED') And (ExistsOnLayer('L1_Top') Or ExistsOnLayer('L8_Bottom'))] p327: gap=0.02 ignorepadtopadclearanceinfootprint=FALSE except(0.089: Hole-Hole) sourcerule=512 cellrowname=UNCLASIFICATE_LOW_SPEED_SIGNALS cellrowtype=2 cellcolname=DDR1_HIGH_SPEED cellcoltype=2 outerlayers=TRUE
Clearance Clearance_3 [InNetClass('UNCLASIFICATE_LOW_SPEED_SIGNALS') vs InNetClass('DDR1_HIGH_SPEED')] p328: gap=0.254 ignorepadtopadclearanceinfootprint=FALSE sourcerule=512 cellrowname=UNCLASIFICATE_LOW_SPEED_SIGNALS cellrowtype=2 cellcolname=DDR1_HIGH_SPEED cellcoltype=2
Clearance Clearance_1 [InNetClass('UNCLASIFICATE_LOW_SPEED_SIGNALS') And (ExistsOnLayer('L3_Sig1') Or ExistsOnLayer('L5_Sig2') Or ExistsOnLayer('L6_Sig3') Or ExistsOnLayer('L8_Sig4')) vs InNetClass('EMMC_HIGH_SPEED') And (ExistsOnLayer('L3_Sig1') Or ExistsOnLayer('L5_Sig2') Or ExistsOnLayer('L6_Sig3') Or ExistsOnLayer('L8_Sig4'))] p329: gap=0.02 ignorepadtopadclearanceinfootprint=FALSE except(0.254: Hole-Hole) sourcerule=512 cellrowname=UNCLASIFICATE_LOW_SPEED_SIGNALS cellrowtype=2 cellcolname=EMMC_HIGH_SPEED cellcoltype=2 innerlayers=TRUE
Clearance Clearance_2 [InNetClass('UNCLASIFICATE_LOW_SPEED_SIGNALS') And (ExistsOnLayer('L1_Top') Or ExistsOnLayer('L8_Bottom')) vs InNetClass('EMMC_HIGH_SPEED') And (ExistsOnLayer('L1_Top') Or ExistsOnLayer('L8_Bottom'))] p330: gap=0.02 ignorepadtopadclearanceinfootprint=FALSE except(0.254: Hole-Hole) sourcerule=512 cellrowname=UNCLASIFICATE_LOW_SPEED_SIGNALS cellrowtype=2 cellcolname=EMMC_HIGH_SPEED cellcoltype=2 outerlayers=TRUE
Clearance Clearance_3 [InNetClass('UNCLASIFICATE_LOW_SPEED_SIGNALS') vs InNetClass('EMMC_HIGH_SPEED')] p331: gap=0.254 ignorepadtopadclearanceinfootprint=FALSE sourcerule=512 cellrowname=UNCLASIFICATE_LOW_SPEED_SIGNALS cellrowtype=2 cellcolname=EMMC_HIGH_SPEED cellcoltype=2
Clearance Clearance_1 [InNetClass('UNCLASIFICATE_LOW_SPEED_SIGNALS') And (ExistsOnLayer('L3_Sig1') Or ExistsOnLayer('L5_Sig2') Or ExistsOnLayer('L6_Sig3') Or ExistsOnLayer('L8_Sig4')) vs InNetClass('I2S_PROTOCOL') And (ExistsOnLayer('L3_Sig1') Or ExistsOnLayer('L5_Sig2') Or ExistsOnLayer('L6_Sig3') Or ExistsOnLayer('L8_Sig4'))] p332: gap=0.02 ignorepadtopadclearanceinfootprint=FALSE except(0.254: Hole-Hole) sourcerule=512 cellrowname=UNCLASIFICATE_LOW_SPEED_SIGNALS cellrowtype=2 cellcolname=I2S_PROTOCOL cellcoltype=2 innerlayers=TRUE
Clearance Clearance_2 [InNetClass('UNCLASIFICATE_LOW_SPEED_SIGNALS') And (ExistsOnLayer('L1_Top') Or ExistsOnLayer('L8_Bottom')) vs InNetClass('I2S_PROTOCOL') And (ExistsOnLayer('L1_Top') Or ExistsOnLayer('L8_Bottom'))] p333: gap=0.02 ignorepadtopadclearanceinfootprint=FALSE except(0.254: Hole-Hole) sourcerule=512 cellrowname=UNCLASIFICATE_LOW_SPEED_SIGNALS cellrowtype=2 cellcolname=I2S_PROTOCOL cellcoltype=2 outerlayers=TRUE
Clearance Clearance_3 [InNetClass('UNCLASIFICATE_LOW_SPEED_SIGNALS') vs InNetClass('I2S_PROTOCOL')] p334: gap=0.254 ignorepadtopadclearanceinfootprint=FALSE sourcerule=512 cellrowname=UNCLASIFICATE_LOW_SPEED_SIGNALS cellrowtype=2 cellcolname=I2S_PROTOCOL cellcoltype=2
Clearance Clearance_1 [InNetClass('UNCLASIFICATE_LOW_SPEED_SIGNALS') And (ExistsOnLayer('L3_Sig1') Or ExistsOnLayer('L5_Sig2') Or ExistsOnLayer('L6_Sig3') Or ExistsOnLayer('L8_Sig4')) vs InNetClass('MCU_SIGNAL') And (ExistsOnLayer('L3_Sig1') Or ExistsOnLayer('L5_Sig2') Or ExistsOnLayer('L6_Sig3') Or ExistsOnLayer('L8_Sig4'))] p335: gap=0.02 ignorepadtopadclearanceinfootprint=FALSE except(0.254: Hole-Hole) sourcerule=512 cellrowname=UNCLASIFICATE_LOW_SPEED_SIGNALS cellrowtype=2 cellcolname=MCU_SIGNAL cellcoltype=2 innerlayers=TRUE
Clearance Clearance_2 [InNetClass('UNCLASIFICATE_LOW_SPEED_SIGNALS') And (ExistsOnLayer('L1_Top') Or ExistsOnLayer('L8_Bottom')) vs InNetClass('MCU_SIGNAL') And (ExistsOnLayer('L1_Top') Or ExistsOnLayer('L8_Bottom'))] p336: gap=0.02 ignorepadtopadclearanceinfootprint=FALSE except(0.254: Hole-Hole) sourcerule=512 cellrowname=UNCLASIFICATE_LOW_SPEED_SIGNALS cellrowtype=2 cellcolname=MCU_SIGNAL cellcoltype=2 outerlayers=TRUE
Clearance Clearance_3 [InNetClass('UNCLASIFICATE_LOW_SPEED_SIGNALS') vs InNetClass('MCU_SIGNAL')] p337: gap=0.254 ignorepadtopadclearanceinfootprint=FALSE sourcerule=512 cellrowname=UNCLASIFICATE_LOW_SPEED_SIGNALS cellrowtype=2 cellcolname=MCU_SIGNAL cellcoltype=2
Clearance Clearance_1 [InNetClass('UNCLASIFICATE_LOW_SPEED_SIGNALS') And (ExistsOnLayer('L3_Sig1') Or ExistsOnLayer('L5_Sig2') Or ExistsOnLayer('L6_Sig3') Or ExistsOnLayer('L8_Sig4')) vs InNetClass('MIPI_HIGH_SPEED') And (ExistsOnLayer('L3_Sig1') Or ExistsOnLayer('L5_Sig2') Or ExistsOnLayer('L6_Sig3') Or ExistsOnLayer('L8_Sig4'))] p338: gap=0.02 ignorepadtopadclearanceinfootprint=FALSE except(0.254: Hole-Hole) sourcerule=512 cellrowname=UNCLASIFICATE_LOW_SPEED_SIGNALS cellrowtype=2 cellcolname=MIPI_HIGH_SPEED cellcoltype=2 innerlayers=TRUE
Clearance Clearance_2 [InNetClass('UNCLASIFICATE_LOW_SPEED_SIGNALS') And (ExistsOnLayer('L1_Top') Or ExistsOnLayer('L8_Bottom')) vs InNetClass('MIPI_HIGH_SPEED') And (ExistsOnLayer('L1_Top') Or ExistsOnLayer('L8_Bottom'))] p339: gap=0.02 ignorepadtopadclearanceinfootprint=FALSE except(0.254: Hole-Hole) sourcerule=512 cellrowname=UNCLASIFICATE_LOW_SPEED_SIGNALS cellrowtype=2 cellcolname=MIPI_HIGH_SPEED cellcoltype=2 outerlayers=TRUE
Clearance Clearance_3 [InNetClass('UNCLASIFICATE_LOW_SPEED_SIGNALS') vs InNetClass('MIPI_HIGH_SPEED')] p340: gap=0.254 ignorepadtopadclearanceinfootprint=FALSE sourcerule=512 cellrowname=UNCLASIFICATE_LOW_SPEED_SIGNALS cellrowtype=2 cellcolname=MIPI_HIGH_SPEED cellcoltype=2
Clearance Clearance_1 [InNetClass('UNCLASIFICATE_LOW_SPEED_SIGNALS') And (ExistsOnLayer('L3_Sig1') Or ExistsOnLayer('L5_Sig2') Or ExistsOnLayer('L6_Sig3') Or ExistsOnLayer('L8_Sig4')) vs InNetClass('PERIPHERICS_SIGNALS') And (ExistsOnLayer('L3_Sig1') Or ExistsOnLayer('L5_Sig2') Or ExistsOnLayer('L6_Sig3') Or ExistsOnLayer('L8_Sig4'))] p341: gap=0.02 ignorepadtopadclearanceinfootprint=FALSE except(0.254: Hole-Hole) sourcerule=512 cellrowname=UNCLASIFICATE_LOW_SPEED_SIGNALS cellrowtype=2 cellcolname=PERIPHERICS_SIGNALS cellcoltype=2 innerlayers=TRUE
Clearance Clearance_2 [InNetClass('UNCLASIFICATE_LOW_SPEED_SIGNALS') And (ExistsOnLayer('L1_Top') Or ExistsOnLayer('L8_Bottom')) vs InNetClass('PERIPHERICS_SIGNALS') And (ExistsOnLayer('L1_Top') Or ExistsOnLayer('L8_Bottom'))] p342: gap=0.02 ignorepadtopadclearanceinfootprint=FALSE except(0.254: Hole-Hole) sourcerule=512 cellrowname=UNCLASIFICATE_LOW_SPEED_SIGNALS cellrowtype=2 cellcolname=PERIPHERICS_SIGNALS cellcoltype=2 outerlayers=TRUE
Clearance Clearance_3 [InNetClass('UNCLASIFICATE_LOW_SPEED_SIGNALS') vs InNetClass('PERIPHERICS_SIGNALS')] p343: gap=0.254 ignorepadtopadclearanceinfootprint=FALSE sourcerule=512 cellrowname=UNCLASIFICATE_LOW_SPEED_SIGNALS cellrowtype=2 cellcolname=PERIPHERICS_SIGNALS cellcoltype=2
Clearance Clearance_1 [InNetClass('UNCLASIFICATE_LOW_SPEED_SIGNALS') And (ExistsOnLayer('L3_Sig1') Or ExistsOnLayer('L5_Sig2') Or ExistsOnLayer('L6_Sig3') Or ExistsOnLayer('L8_Sig4')) vs InNetClass('POWER_SIGNALS') And (ExistsOnLayer('L3_Sig1') Or ExistsOnLayer('L5_Sig2') Or ExistsOnLayer('L6_Sig3') Or ExistsOnLayer('L8_Sig4'))] p344: gap=0.02 ignorepadtopadclearanceinfootprint=FALSE except(0.254: Hole-Hole) sourcerule=512 cellrowname=UNCLASIFICATE_LOW_SPEED_SIGNALS cellrowtype=2 cellcolname=POWER_SIGNALS cellcoltype=2 innerlayers=TRUE
Clearance Clearance_2 [InNetClass('UNCLASIFICATE_LOW_SPEED_SIGNALS') And (ExistsOnLayer('L1_Top') Or ExistsOnLayer('L8_Bottom')) vs InNetClass('POWER_SIGNALS') And (ExistsOnLayer('L1_Top') Or ExistsOnLayer('L8_Bottom'))] p345: gap=0.02 ignorepadtopadclearanceinfootprint=FALSE except(0.254: Hole-Hole) sourcerule=512 cellrowname=UNCLASIFICATE_LOW_SPEED_SIGNALS cellrowtype=2 cellcolname=POWER_SIGNALS cellcoltype=2 outerlayers=TRUE
Clearance Clearance_3 [InNetClass('UNCLASIFICATE_LOW_SPEED_SIGNALS') vs InNetClass('POWER_SIGNALS')] p346: gap=0.254 ignorepadtopadclearanceinfootprint=FALSE sourcerule=512 cellrowname=UNCLASIFICATE_LOW_SPEED_SIGNALS cellrowtype=2 cellcolname=POWER_SIGNALS cellcoltype=2
Clearance Clearance_1 [InNetClass('UNCLASIFICATE_LOW_SPEED_SIGNALS') And (ExistsOnLayer('L3_Sig1') Or ExistsOnLayer('L5_Sig2') Or ExistsOnLayer('L6_Sig3') Or ExistsOnLayer('L8_Sig4')) vs InNetClass('POWER_SUPPLY') And (ExistsOnLayer('L3_Sig1') Or ExistsOnLayer('L5_Sig2') Or ExistsOnLayer('L6_Sig3') Or ExistsOnLayer('L8_Sig4'))] p347: gap=0.02 ignorepadtopadclearanceinfootprint=FALSE except(0.254: Hole-Hole) sourcerule=512 cellrowname=UNCLASIFICATE_LOW_SPEED_SIGNALS cellrowtype=2 cellcolname=POWER_SUPPLY cellcoltype=2 innerlayers=TRUE
Clearance Clearance_2 [InNetClass('UNCLASIFICATE_LOW_SPEED_SIGNALS') And (ExistsOnLayer('L1_Top') Or ExistsOnLayer('L8_Bottom')) vs InNetClass('POWER_SUPPLY') And (ExistsOnLayer('L1_Top') Or ExistsOnLayer('L8_Bottom'))] p348: gap=0.02 ignorepadtopadclearanceinfootprint=FALSE except(0.254: Hole-Hole) sourcerule=512 cellrowname=UNCLASIFICATE_LOW_SPEED_SIGNALS cellrowtype=2 cellcolname=POWER_SUPPLY cellcoltype=2 outerlayers=TRUE
Clearance Clearance_3 [InNetClass('UNCLASIFICATE_LOW_SPEED_SIGNALS') vs InNetClass('POWER_SUPPLY')] p349: gap=0.254 ignorepadtopadclearanceinfootprint=FALSE sourcerule=512 cellrowname=UNCLASIFICATE_LOW_SPEED_SIGNALS cellrowtype=2 cellcolname=POWER_SUPPLY cellcoltype=2
Clearance Clearance_1 [InNetClass('UNCLASIFICATE_LOW_SPEED_SIGNALS') And (ExistsOnLayer('L3_Sig1') Or ExistsOnLayer('L5_Sig2') Or ExistsOnLayer('L6_Sig3') Or ExistsOnLayer('L8_Sig4')) vs InNetClass('PULL_DOWN_UP_RESISTENCE') And (ExistsOnLayer('L3_Sig1') Or ExistsOnLayer('L5_Sig2') Or ExistsOnLayer('L6_Sig3') Or ExistsOnLayer('L8_Sig4'))] p350: gap=0.02 ignorepadtopadclearanceinfootprint=FALSE except(0.254: Hole-Hole) sourcerule=512 cellrowname=UNCLASIFICATE_LOW_SPEED_SIGNALS cellrowtype=2 cellcolname=PULL_DOWN_UP_RESISTENCE cellcoltype=2 innerlayers=TRUE
Clearance Clearance_2 [InNetClass('UNCLASIFICATE_LOW_SPEED_SIGNALS') And (ExistsOnLayer('L1_Top') Or ExistsOnLayer('L8_Bottom')) vs InNetClass('PULL_DOWN_UP_RESISTENCE') And (ExistsOnLayer('L1_Top') Or ExistsOnLayer('L8_Bottom'))] p351: gap=0.02 ignorepadtopadclearanceinfootprint=FALSE except(0.254: Hole-Hole) sourcerule=512 cellrowname=UNCLASIFICATE_LOW_SPEED_SIGNALS cellrowtype=2 cellcolname=PULL_DOWN_UP_RESISTENCE cellcoltype=2 outerlayers=TRUE
Clearance Clearance_3 [InNetClass('UNCLASIFICATE_LOW_SPEED_SIGNALS') vs InNetClass('PULL_DOWN_UP_RESISTENCE')] p352: gap=0.254 ignorepadtopadclearanceinfootprint=FALSE sourcerule=512 cellrowname=UNCLASIFICATE_LOW_SPEED_SIGNALS cellrowtype=2 cellcolname=PULL_DOWN_UP_RESISTENCE cellcoltype=2
Clearance Clearance_1 [InNetClass('UNCLASIFICATE_LOW_SPEED_SIGNALS') And (ExistsOnLayer('L3_Sig1') Or ExistsOnLayer('L5_Sig2') Or ExistsOnLayer('L6_Sig3') Or ExistsOnLayer('L8_Sig4')) vs InNetClass('TYPEC_SIGNALS') And (ExistsOnLayer('L3_Sig1') Or ExistsOnLayer('L5_Sig2') Or ExistsOnLayer('L6_Sig3') Or ExistsOnLayer('L8_Sig4'))] p353: gap=0.02 ignorepadtopadclearanceinfootprint=FALSE except(0.254: Hole-Hole) sourcerule=512 cellrowname=UNCLASIFICATE_LOW_SPEED_SIGNALS cellrowtype=2 cellcolname=TYPEC_SIGNALS cellcoltype=2 innerlayers=TRUE
Clearance Clearance_2 [InNetClass('UNCLASIFICATE_LOW_SPEED_SIGNALS') And (ExistsOnLayer('L1_Top') Or ExistsOnLayer('L8_Bottom')) vs InNetClass('TYPEC_SIGNALS') And (ExistsOnLayer('L1_Top') Or ExistsOnLayer('L8_Bottom'))] p354: gap=0.02 ignorepadtopadclearanceinfootprint=FALSE except(0.254: Hole-Hole) sourcerule=512 cellrowname=UNCLASIFICATE_LOW_SPEED_SIGNALS cellrowtype=2 cellcolname=TYPEC_SIGNALS cellcoltype=2 outerlayers=TRUE
Clearance Clearance_3 [InNetClass('UNCLASIFICATE_LOW_SPEED_SIGNALS') vs InNetClass('TYPEC_SIGNALS')] p355: gap=0.254 ignorepadtopadclearanceinfootprint=FALSE sourcerule=512 cellrowname=UNCLASIFICATE_LOW_SPEED_SIGNALS cellrowtype=2 cellcolname=TYPEC_SIGNALS cellcoltype=2
Clearance Clearance_1 [InNetClass('UNCLASIFICATE_LOW_SPEED_SIGNALS') And (ExistsOnLayer('L3_Sig1') Or ExistsOnLayer('L5_Sig2') Or ExistsOnLayer('L6_Sig3') Or ExistsOnLayer('L8_Sig4')) vs InNetClass('UNCLASIFICATE_LOW_SPEED_SIGNALS') And (ExistsOnLayer('L3_Sig1') Or ExistsOnLayer('L5_Sig2') Or ExistsOnLayer('L6_Sig3') Or ExistsOnLayer('L8_Sig4'))] p356: gap=0.02 ignorepadtopadclearanceinfootprint=FALSE except(0.254: Hole-Hole) sourcerule=512 cellrowname=UNCLASIFICATE_LOW_SPEED_SIGNALS cellrowtype=2 cellcolname=UNCLASIFICATE_LOW_SPEED_SIGNALS cellcoltype=2 innerlayers=TRUE
Clearance Clearance_2 [InNetClass('UNCLASIFICATE_LOW_SPEED_SIGNALS') And (ExistsOnLayer('L1_Top') Or ExistsOnLayer('L8_Bottom')) vs InNetClass('UNCLASIFICATE_LOW_SPEED_SIGNALS') And (ExistsOnLayer('L1_Top') Or ExistsOnLayer('L8_Bottom'))] p357: gap=0.02 ignorepadtopadclearanceinfootprint=FALSE except(0.254: Hole-Hole) sourcerule=512 cellrowname=UNCLASIFICATE_LOW_SPEED_SIGNALS cellrowtype=2 cellcolname=UNCLASIFICATE_LOW_SPEED_SIGNALS cellcoltype=2 outerlayers=TRUE
Clearance Clearance_3 [InNetClass('UNCLASIFICATE_LOW_SPEED_SIGNALS') vs InNetClass('UNCLASIFICATE_LOW_SPEED_SIGNALS')] p358: gap=0.254 ignorepadtopadclearanceinfootprint=FALSE sourcerule=512 cellrowname=UNCLASIFICATE_LOW_SPEED_SIGNALS cellrowtype=2 cellcolname=UNCLASIFICATE_LOW_SPEED_SIGNALS cellcoltype=2
Clearance Clearance_1 [InNetClass('WIFI_BT_SIGNAL') And (ExistsOnLayer('L3_Sig1') Or ExistsOnLayer('L5_Sig2') Or ExistsOnLayer('L6_Sig3') Or ExistsOnLayer('L8_Sig4')) vs InNetClass('ANTENAS') And (ExistsOnLayer('L3_Sig1') Or ExistsOnLayer('L5_Sig2') Or ExistsOnLayer('L6_Sig3') Or ExistsOnLayer('L8_Sig4'))] p359: gap=0.02 ignorepadtopadclearanceinfootprint=FALSE except(0.05: Hole-Hole) sourcerule=512 cellrowname=WIFI_BT_SIGNAL cellrowtype=2 cellcolname=ANTENAS cellcoltype=2 innerlayers=TRUE
Clearance Clearance_2 [InNetClass('WIFI_BT_SIGNAL') And (ExistsOnLayer('L1_Top') Or ExistsOnLayer('L8_Bottom')) vs InNetClass('ANTENAS') And (ExistsOnLayer('L1_Top') Or ExistsOnLayer('L8_Bottom'))] p360: gap=0.02 ignorepadtopadclearanceinfootprint=FALSE except(0.05: Hole-Hole) sourcerule=512 cellrowname=WIFI_BT_SIGNAL cellrowtype=2 cellcolname=ANTENAS cellcoltype=2 outerlayers=TRUE
Clearance Clearance_3 [InNetClass('WIFI_BT_SIGNAL') vs InNetClass('ANTENAS')] p361: gap=0.254 ignorepadtopadclearanceinfootprint=FALSE sourcerule=512 cellrowname=WIFI_BT_SIGNAL cellrowtype=2 cellcolname=ANTENAS cellcoltype=2
Clearance Clearance_1 [InNetClass('WIFI_BT_SIGNAL') And (ExistsOnLayer('L3_Sig1') Or ExistsOnLayer('L5_Sig2') Or ExistsOnLayer('L6_Sig3') Or ExistsOnLayer('L8_Sig4')) vs (ExistsOnLayer('L3_Sig1') Or ExistsOnLayer('L5_Sig2') Or ExistsOnLayer('L6_Sig3') Or ExistsOnLayer('L8_Sig4'))] p362: gap=0.02 ignorepadtopadclearanceinfootprint=FALSE except(0.254: Hole-Hole) sourcerule=512 cellrowname=WIFI_BT_SIGNAL cellrowtype=2 cellcolname=All cellcoltype=0 innerlayers=TRUE
Clearance Clearance_2 [InNetClass('WIFI_BT_SIGNAL') And (ExistsOnLayer('L1_Top') Or ExistsOnLayer('L8_Bottom')) vs (ExistsOnLayer('L1_Top') Or ExistsOnLayer('L8_Bottom'))] p363: gap=0.02 ignorepadtopadclearanceinfootprint=FALSE except(0.254: Hole-Hole) sourcerule=512 cellrowname=WIFI_BT_SIGNAL cellrowtype=2 cellcolname=All cellcoltype=0 outerlayers=TRUE
Clearance Clearance_3 [InNetClass('WIFI_BT_SIGNAL')] p364: gap=0.254 ignorepadtopadclearanceinfootprint=FALSE sourcerule=512 cellrowname=WIFI_BT_SIGNAL cellrowtype=2 cellcolname=All cellcoltype=0
Clearance Clearance_1 [InNetClass('WIFI_BT_SIGNAL') And (ExistsOnLayer('L3_Sig1') Or ExistsOnLayer('L5_Sig2') Or ExistsOnLayer('L6_Sig3') Or ExistsOnLayer('L8_Sig4')) vs InNetClass('CPU_SIGNAL') And (ExistsOnLayer('L3_Sig1') Or ExistsOnLayer('L5_Sig2') Or ExistsOnLayer('L6_Sig3') Or ExistsOnLayer('L8_Sig4'))] p365: gap=0.02 ignorepadtopadclearanceinfootprint=FALSE except(0.254: Hole-Hole) sourcerule=512 cellrowname=WIFI_BT_SIGNAL cellrowtype=2 cellcolname=CPU_SIGNAL cellcoltype=2 innerlayers=TRUE
Clearance Clearance_2 [InNetClass('WIFI_BT_SIGNAL') And (ExistsOnLayer('L1_Top') Or ExistsOnLayer('L8_Bottom')) vs InNetClass('CPU_SIGNAL') And (ExistsOnLayer('L1_Top') Or ExistsOnLayer('L8_Bottom'))] p366: gap=0.02 ignorepadtopadclearanceinfootprint=FALSE except(0.254: Hole-Hole) sourcerule=512 cellrowname=WIFI_BT_SIGNAL cellrowtype=2 cellcolname=CPU_SIGNAL cellcoltype=2 outerlayers=TRUE
Clearance Clearance_3 [InNetClass('WIFI_BT_SIGNAL') vs InNetClass('CPU_SIGNAL')] p367: gap=0.254 ignorepadtopadclearanceinfootprint=FALSE sourcerule=512 cellrowname=WIFI_BT_SIGNAL cellrowtype=2 cellcolname=CPU_SIGNAL cellcoltype=2
Clearance Clearance_1 [InNetClass('WIFI_BT_SIGNAL') And (ExistsOnLayer('L3_Sig1') Or ExistsOnLayer('L5_Sig2') Or ExistsOnLayer('L6_Sig3') Or ExistsOnLayer('L8_Sig4')) vs InNetClass('CSI_HIGH_SPEED') And (ExistsOnLayer('L3_Sig1') Or ExistsOnLayer('L5_Sig2') Or ExistsOnLayer('L6_Sig3') Or ExistsOnLayer('L8_Sig4'))] p368: gap=0.02 ignorepadtopadclearanceinfootprint=FALSE except(0.254: Hole-Hole) sourcerule=512 cellrowname=WIFI_BT_SIGNAL cellrowtype=2 cellcolname=CSI_HIGH_SPEED cellcoltype=2 innerlayers=TRUE
Clearance Clearance_2 [InNetClass('WIFI_BT_SIGNAL') And (ExistsOnLayer('L1_Top') Or ExistsOnLayer('L8_Bottom')) vs InNetClass('CSI_HIGH_SPEED') And (ExistsOnLayer('L1_Top') Or ExistsOnLayer('L8_Bottom'))] p369: gap=0.02 ignorepadtopadclearanceinfootprint=FALSE except(0.254: Hole-Hole) sourcerule=512 cellrowname=WIFI_BT_SIGNAL cellrowtype=2 cellcolname=CSI_HIGH_SPEED cellcoltype=2 outerlayers=TRUE
Clearance Clearance_3 [InNetClass('WIFI_BT_SIGNAL') vs InNetClass('CSI_HIGH_SPEED')] p370: gap=0.254 ignorepadtopadclearanceinfootprint=FALSE sourcerule=512 cellrowname=WIFI_BT_SIGNAL cellrowtype=2 cellcolname=CSI_HIGH_SPEED cellcoltype=2
Clearance Clearance_1 [InNetClass('WIFI_BT_SIGNAL') And (ExistsOnLayer('L3_Sig1') Or ExistsOnLayer('L5_Sig2') Or ExistsOnLayer('L6_Sig3') Or ExistsOnLayer('L8_Sig4')) vs InNetClass('DDR1_HIGH_SPEED') And (ExistsOnLayer('L3_Sig1') Or ExistsOnLayer('L5_Sig2') Or ExistsOnLayer('L6_Sig3') Or ExistsOnLayer('L8_Sig4'))] p371: gap=0.02 ignorepadtopadclearanceinfootprint=FALSE except(0.089: Hole-Hole) sourcerule=512 cellrowname=WIFI_BT_SIGNAL cellrowtype=2 cellcolname=DDR1_HIGH_SPEED cellcoltype=2 innerlayers=TRUE
Clearance Clearance_2 [InNetClass('WIFI_BT_SIGNAL') And (ExistsOnLayer('L1_Top') Or ExistsOnLayer('L8_Bottom')) vs InNetClass('DDR1_HIGH_SPEED') And (ExistsOnLayer('L1_Top') Or ExistsOnLayer('L8_Bottom'))] p372: gap=0.02 ignorepadtopadclearanceinfootprint=FALSE except(0.089: Hole-Hole) sourcerule=512 cellrowname=WIFI_BT_SIGNAL cellrowtype=2 cellcolname=DDR1_HIGH_SPEED cellcoltype=2 outerlayers=TRUE
Clearance Clearance_3 [InNetClass('WIFI_BT_SIGNAL') vs InNetClass('DDR1_HIGH_SPEED')] p373: gap=0.254 ignorepadtopadclearanceinfootprint=FALSE sourcerule=512 cellrowname=WIFI_BT_SIGNAL cellrowtype=2 cellcolname=DDR1_HIGH_SPEED cellcoltype=2
Clearance Clearance_1 [InNetClass('WIFI_BT_SIGNAL') And (ExistsOnLayer('L3_Sig1') Or ExistsOnLayer('L5_Sig2') Or ExistsOnLayer('L6_Sig3') Or ExistsOnLayer('L8_Sig4')) vs InNetClass('EMMC_HIGH_SPEED') And (ExistsOnLayer('L3_Sig1') Or ExistsOnLayer('L5_Sig2') Or ExistsOnLayer('L6_Sig3') Or ExistsOnLayer('L8_Sig4'))] p374: gap=0.02 ignorepadtopadclearanceinfootprint=FALSE except(0.254: Hole-Hole) sourcerule=512 cellrowname=WIFI_BT_SIGNAL cellrowtype=2 cellcolname=EMMC_HIGH_SPEED cellcoltype=2 innerlayers=TRUE